# EAGLE board mff2-to-4ffnano v1.0 (EAGLE 9.6.2)
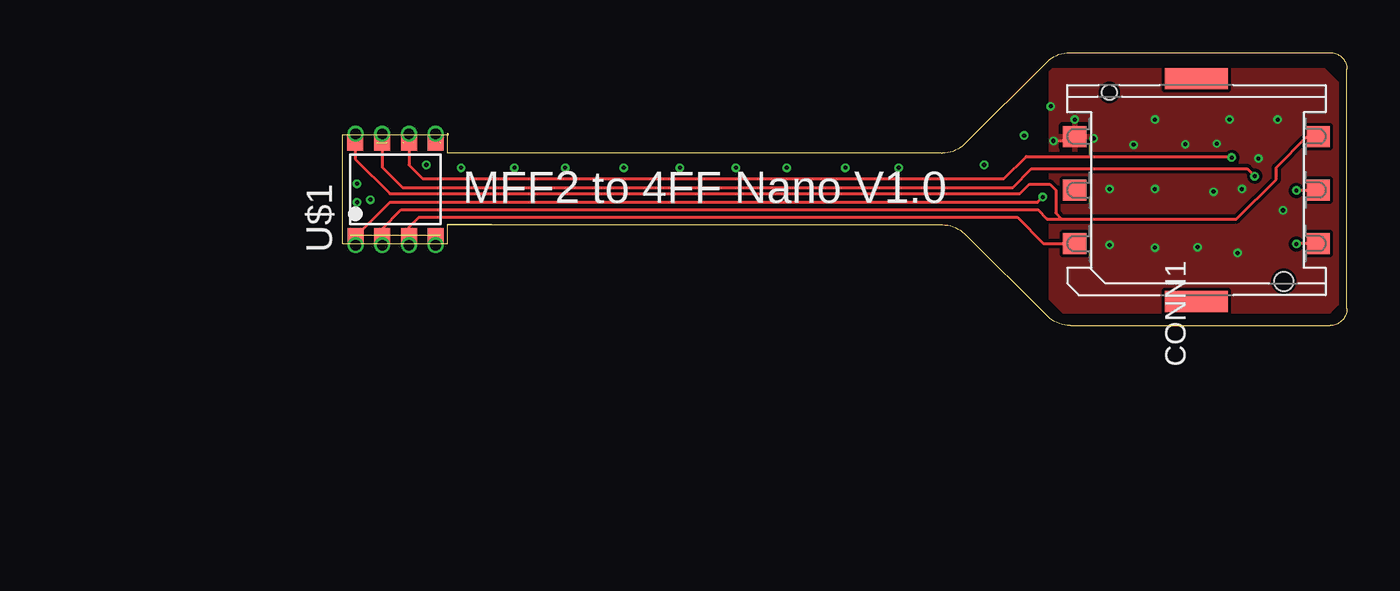
[diagram p0: board, top side]
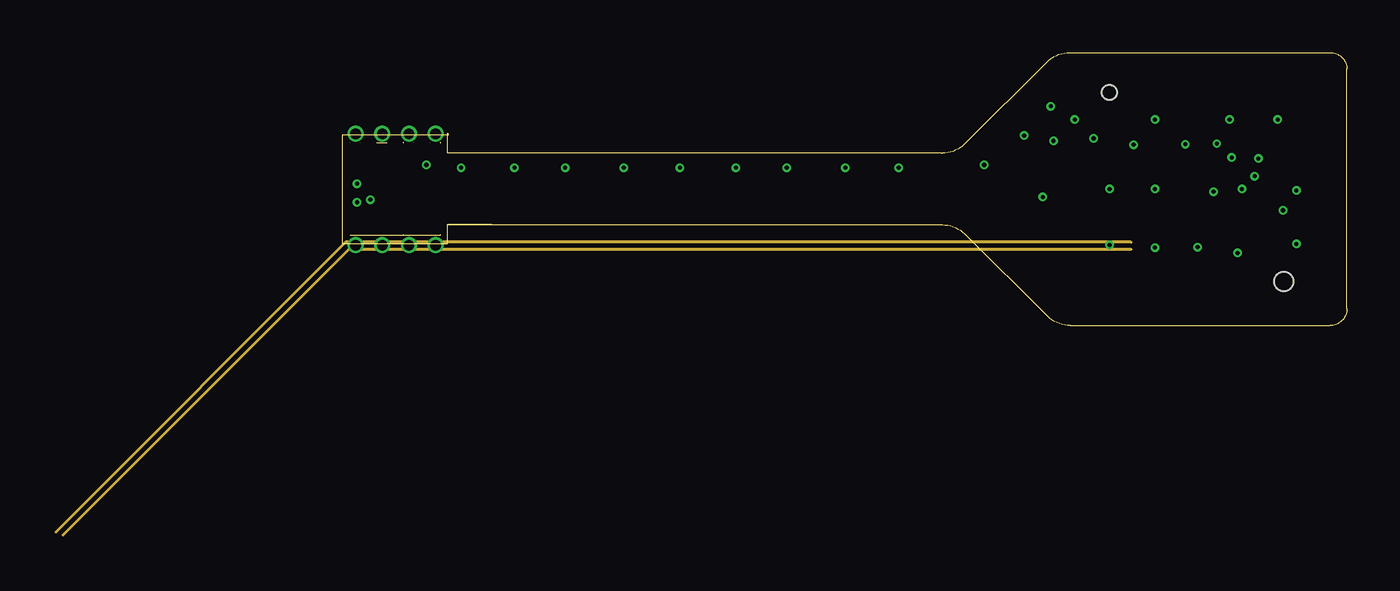
[diagram p1: board, inner layer L2-SIGNAL]
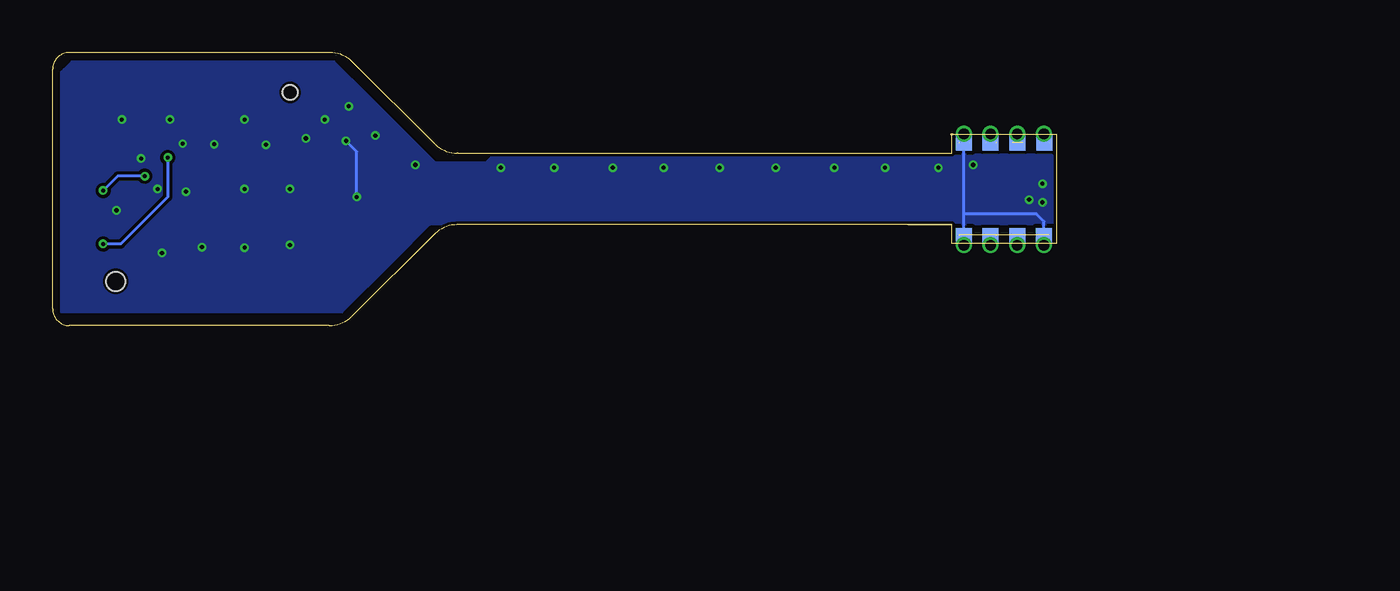
[diagram p2: board, bottom side, seen from below]

Size 47.8 x 13 mm. Coordinates in mm from the lower left corner, seen from the top.
Outline: 4.96,9.1 0.04,9.1 0,9.1 0,3.9 0.04,3.9 4.96,3.9 5,3.9 5,4.8
Outline: 4.96,9.1 5,9.1 5,8.2 28.5,8.2 28.54,8.2 arc45 29.6,8.64 33.54,12.56 arc-45 34.6,13 34.64,13 46.96,13 47,13 arc-90 47.8,12.2 47.8,0.8 arc-90 47,0 46.96,0 34.66,0 34.62,0 arc-44 33.56,0.43 29.6,4.37 arc44 28.54,4.8 28.5,4.8 5,4.8
Outline: 4.96,9.1 arc180 5.04,9.1
Outline: 5.04,9.1 arc180 4.96,9.1
Outline: 4.96,9.1 arc180 5.04,9.1
Outline: 5.04,9.1 arc180 4.96,9.1
Outline: 7.1,4.8 5,4.8
Outline: 0.35,4.3 arc180 0.35,4.3
Outline: 0.35,4.3 arc180 0.35,4.3
Outline: 0.35,8.7 arc180 0.35,8.7
Outline: 0.35,8.7 arc180 0.35,8.7
Outline: 0.35,4.3 0.35,4.3
Outline: 0.84,4.3 0.84,4.3
Outline: 0.84,4.3 1.62,4.3
Outline: 1.62,4.3 1.62,4.3
Outline: 2.11,4.3 2.11,4.3
Outline: 2.11,4.3 2.89,4.3
Outline: 2.89,4.3 2.89,4.3
Outline: 3.38,4.3 3.38,4.3
Outline: 3.38,4.3 4.16,4.3
Outline: 4.16,4.3 4.16,4.3
Outline: 4.65,4.3 4.65,4.3
Outline: 0.35,4.3 arc180 0.35,4.3
Outline: 0.35,4.3 arc180 0.35,4.3
Outline: 4.65,4.3 arc180 4.65,4.3
Outline: 4.65,4.3 arc180 4.65,4.3
Outline: 4.65,4.3 arc180 4.65,4.3
Outline: 4.65,4.3 arc180 4.65,4.3
Outline: 4.65,8.7 arc180 4.65,8.7
Outline: 4.65,8.7 arc180 4.65,8.7
Outline: 0.84,8.7 0.84,8.7
Outline: 1.62,8.7 1.62,8.7
Outline: 2.11,8.7 2.11,8.7
Outline: 2.89,8.7 2.89,8.7
Outline: 3.38,8.7 3.38,8.7
Outline: 4.16,8.7 4.16,8.7
Outline: 4.65,8.7 4.65,8.7
Outline: 0.35,8.7 arc180 0.35,8.7
Outline: 0.35,8.7 arc180 0.35,8.7
Outline: 4.65,8.7 arc180 4.65,8.7
Outline: 4.65,8.7 arc180 4.65,8.7
Outline: 4.16,4.3 arc180 4.16,4.3
Outline: 4.16,4.3 arc180 4.16,4.3
Outline: 4.65,4.3 arc180 4.65,4.3
Outline: 4.65,4.3 arc180 4.65,4.3
Outline: 4.16,4.3 4.65,4.3
Outline: 4.16,4.3 arc180 4.16,4.3
Outline: 4.16,4.3 arc180 4.16,4.3
Outline: 4.65,4.3 arc180 4.65,4.3
Outline: 4.65,4.3 arc180 4.65,4.3
Outline: 2.89,4.3 arc180 2.89,4.3
Outline: 2.89,4.3 arc180 2.89,4.3
Outline: 3.38,4.3 arc180 3.38,4.3
Outline: 3.38,4.3 arc180 3.38,4.3
Outline: 2.89,4.3 3.38,4.3
Outline: 2.89,4.3 arc180 2.89,4.3
Outline: 2.89,4.3 arc180 2.89,4.3
Outline: 3.38,4.3 arc180 3.38,4.3
Outline: 3.38,4.3 arc180 3.38,4.3
Outline: 1.62,4.3 arc180 1.62,4.3
Outline: 1.62,4.3 arc180 1.62,4.3
Outline: 2.11,4.3 arc180 2.11,4.3
Outline: 2.11,4.3 arc180 2.11,4.3
Outline: 1.62,4.3 2.11,4.3
Outline: 1.62,4.3 arc180 1.62,4.3
Outline: 1.62,4.3 arc180 1.62,4.3
Outline: 2.11,4.3 arc180 2.11,4.3
Outline: 2.11,4.3 arc180 2.11,4.3
Outline: 0.35,4.3 arc180 0.35,4.3
Outline: 0.35,4.3 arc180 0.35,4.3
Outline: 0.84,4.3 arc180 0.84,4.3
Outline: 0.84,4.3 arc180 0.84,4.3
Outline: 0.35,4.3 0.84,4.3
Outline: 0.35,4.3 arc180 0.35,4.3
Outline: 0.35,4.3 arc180 0.35,4.3
Outline: 0.84,4.3 arc180 0.84,4.3
Outline: 0.84,4.3 arc180 0.84,4.3
Outline: 4.16,8.7 arc180 4.16,8.7
Outline: 4.16,8.7 arc180 4.16,8.7
Outline: 4.65,8.7 arc180 4.65,8.7
Outline: 4.65,8.7 arc180 4.65,8.7
Outline: 4.16,8.7 arc180 4.16,8.7
Outline: 4.16,8.7 arc180 4.16,8.7
Outline: 4.65,8.7 arc180 4.65,8.7
Outline: 4.65,8.7 arc180 4.65,8.7
Outline: 2.89,8.7 arc180 2.89,8.7
Outline: 2.89,8.7 arc180 2.89,8.7
Outline: 3.38,8.7 arc180 3.38,8.7
Outline: 3.38,8.7 arc180 3.38,8.7
Outline: 2.89,8.7 arc180 2.89,8.7
Outline: 2.89,8.7 arc180 2.89,8.7
Outline: 3.38,8.7 arc180 3.38,8.7
Outline: 3.38,8.7 arc180 3.38,8.7
Outline: 1.62,8.7 arc180 1.62,8.7
Outline: 1.62,8.7 arc180 1.62,8.7
Outline: 2.11,8.7 arc180 2.11,8.7
Outline: 2.11,8.7 arc180 2.11,8.7
Outline: 1.62,8.7 2.11,8.7
Outline: 1.62,8.7 arc180 1.62,8.7
Outline: 1.62,8.7 arc180 1.62,8.7
Outline: 2.11,8.7 arc180 2.11,8.7
Outline: 2.11,8.7 arc180 2.11,8.7
Outline: 0.35,8.7 arc180 0.35,8.7
Outline: 0.35,8.7 arc180 0.35,8.7
Outline: 0.35,8.7 0.35,8.7
Outline: 0.35,8.7 arc180 0.35,8.7
Outline: 0.35,8.7 arc180 0.35,8.7
Outline: 0.84,8.7 arc180 0.84,8.7
Outline: 0.84,8.7 arc180 0.84,8.7
Outline: 0.84,8.7 arc180 0.84,8.7
Copper layers (1*16): L1-TOP 0.035mm / dielectric 0.1mm / L6-BOTTOM 0.035mm
Design rules "particle-6layer *": minimum track width 4mil, minimum drill 0.1mm, track to track 6mil, track to pad 6mil, pad to pad 6mil, via to via 6mil, smd to smd 0mil, copper to edge 6mil, drill to drill 6mil, minimum pad ring 4mil, minimum via ring 4mil, stop-mask expansion 0mil, vias tented up to drill 20mil, thermal gap 8mil
Net classes: 1 DIFF_PAIR: width 0.203 mm, clearance 0.203 mm; 2 RF: width 0.203 mm, clearance 0.257 mm; 3 usb_lay3: width 0.152 mm, clearance 0.191 mm; 4 3V3: width 0.305 mm, clearance 0.508 mm; 5 USB_top: width 0.406 mm, drill 0.2 mm, clearance 0.152 mm; 6 +3V3: width 0.203 mm, clearance 0.152 mm; 7 PMID: width 0.305 mm, clearance 0.508 mm

## Footprints (pad centres in the part's own frame; a part is rotated, then mirrored left to right if it is on the bottom)
GCT-SIM8100 = smd 1 x 1.1: C1 2.54,-5.8; C2 0,-5.8; C3 -2.54,-5.8; C5 2.54,5.8; C6 0,5.8; C7 -2.54,5.8 | smd 1 x 3: NC@1 -5.3,0; NC@2 5.3,0 | hole 0.7: 4.65,4.15 | hole 0.9: -4.35,-4.15
MFF2 = smd 0.8 x 0.76 bottom: 1 -2.245,1.895; 2 -2.245,0.625; 3 -2.224,-0.645; 4 -2.245,-1.915; 5 2.245,-1.915; 6 2.245,-0.645; 7 2.245,0.625; 8 2.245,1.905 | smd 0.8 x 0.76: 9 -2.245,1.895; 10 -2.245,0.625; 11 -2.224,-0.645; 12 -2.245,-1.915; 13 2.245,-1.915; 14 2.245,-0.645; 15 2.245,0.625; 16 2.245,1.905 | drill 0.51 pad 0.76: P$6 -2.65,1.893; P$7 -2.65,0.623; P$8 -2.65,-0.647; P$9 -2.65,-1.917; P$10 2.65,-1.917; P$11 2.65,-0.647; P$12 2.65,0.623; P$13 2.65,1.893

## Placement (x,y rotation side)
CONN1  SIM-NANO-4FF  [GCT-SIM8100]  40.64,6.45 90 top
U$1  ESIM  [MFF2]  2.51,6.48 90 top

## Library data of the parts
CONN1 = Particle
U$1 = mff2-to-4ffnano

## Nets
GND: CONN1.C5 U$1.1 U$1.4 U$1.5 U$1.9 U$1.12 U$1.13 U$1.P$6 U$1.P$9 U$1.P$10
SIM_CLK: CONN1.C3 U$1.6 U$1.14 U$1.P$11
SIM_DATA: CONN1.C7 U$1.3 U$1.11 U$1.P$8
SIM_RST: CONN1.C2 U$1.7 U$1.15 U$1.P$12
SIM_VCC: CONN1.C1 U$1.2 U$1.8 U$1.10 U$1.16 U$1.P$7 U$1.P$13

## Tracks (layer width: path | path; a pad name or v marks a point on that pad's centre or on a via)
GND  (via drill 0.2 pad 0.4)
  L1-TOP 0.152: v33.33,6.12 33.07,5.87 2.25,5.87 U$1.9 U$1.P$6 | CONN1.C5 34.64,8.79 v33.83,8.79 | U$1.P$10 U$1.13 | U$1.P$9 U$1.12
  L6-BOTTOM 0.152: v33.33,6.12 33.33,8.28 v33.83,8.79 | 4.43,5.31 U$1.P$9 U$1.12 | 4.43,5.31 U$1.13 U$1.P$10 | U$1.P$6 0.62,4.06 U$1.9 | U$1.9 0.62,4.96 0.96,5.31 4.43,5.31 | U$1.9
  other vias: 35.74,8.92 34.85,9.8 38.66,9.8 42.21,9.8 38.66,3.71 42.6,3.45 38.66,6.5 41.45,6.38 44.75,5.49 44.5,9.8 36.5,6.5 36.5,3.84 5.64,7.52 8.18,7.52 10.59,7.52 13.39,7.52 16.05,7.52 18.72,7.52 21.13,7.52 23.93,7.52 26.47,7.52 30.53,7.65 32.44,9.04 33.71,10.44 0.69,6.76 1.32,5.99 0.69,5.87 3.99,7.65 37.64,8.61 40.11,8.64 42.8,6.5 41.61,8.66 43.59,7.95 40.69,3.73
  pour L6-BOTTOM: 0.1,8.03 0.1,4.85 0.13,4.83 29.85,4.83 31.62,3.05 34.04,0.63 47.37,0.63 47.37,12.06 47.24,12.19 46.86,12.57 43.05,12.57 34.42,12.57 32.77,10.92 29.59,7.75 27.18,7.75 26.8,8.13 0.25,8.13 0.13,8
  pour L1-TOP: 33.66,12.06 33.66,1.27 34.29,0.63 46.99,0.63 47.37,1.02 47.37,11.56 46.74,12.19 33.78,12.19
MCU_USB_N
  L2-SIGNAL 0.152: 37.53,3.62 0.3,3.62 -13.31,-9.98
MCU_USB_P
  L2-SIGNAL 0.152: 37.53,3.96 0.15,3.96 -13.65,-9.84
SIM_CLK  (via drill 0.2 pad 0.4)
  L1-TOP 0.152: v42.32,8 42.27,8.05 32.54,8.05 31.47,6.98 3.81,6.98 3.16,7.64 U$1.14 U$1.P$11 | CONN1.C3 45.42,3.91 v45.39,3.89
  L6-BOTTOM 0.152: v42.32,8 42.32,6.12 44.55,3.89 v45.39,3.89 | U$1.P$11 U$1.14
SIM_DATA
  L1-TOP 0.152: CONN1.C7 33.35,3.91 32.11,5.16 3.63,5.16 3.16,4.68 U$1.11 U$1.P$8
  L6-BOTTOM 0.152: U$1.11 U$1.P$8
SIM_RST  (via drill 0.2 pad 0.4)
  L1-TOP 0.152: v43.41,7.11 43.05,7.47 32.79,7.47 31.9,6.58 2.85,6.58 1.89,7.54 U$1.15 U$1.P$12 | CONN1.C2 46.42,6.43 v45.39,6.43
  L6-BOTTOM 0.152: v43.41,7.11 44.7,7.11 v45.39,6.43 | U$1.P$12 U$1.15
SIM_VCC
  L1-TOP 0.152: CONN1.C1 45.9,8.99 44.43,7.52 44.43,6.96 42.55,5.08 34.21,5.08 | 34.21,5.08 33.53,5.08 33.1,5.51 2.79,5.51 1.89,4.6 U$1.10 U$1.P$7 | U$1.16 0.61,7.93 2.26,6.27 32.23,6.27 32.69,6.73 33.66,6.73 33.93,6.45 33.93,5.36 34.21,5.08 | U$1.16 0.61,8.87 | U$1.P$13 0.62,8.73 U$1.16
  L6-BOTTOM 0.152: U$1.P$7 U$1.10 | U$1.16 0.61,8.87 0.62,8.88 U$1.P$13

## Text on the board
tPlace: MFF2 to 4FF Nano V1.0